# EAGLE board OPENBOOK v141 (EAGLE 9.7.0)
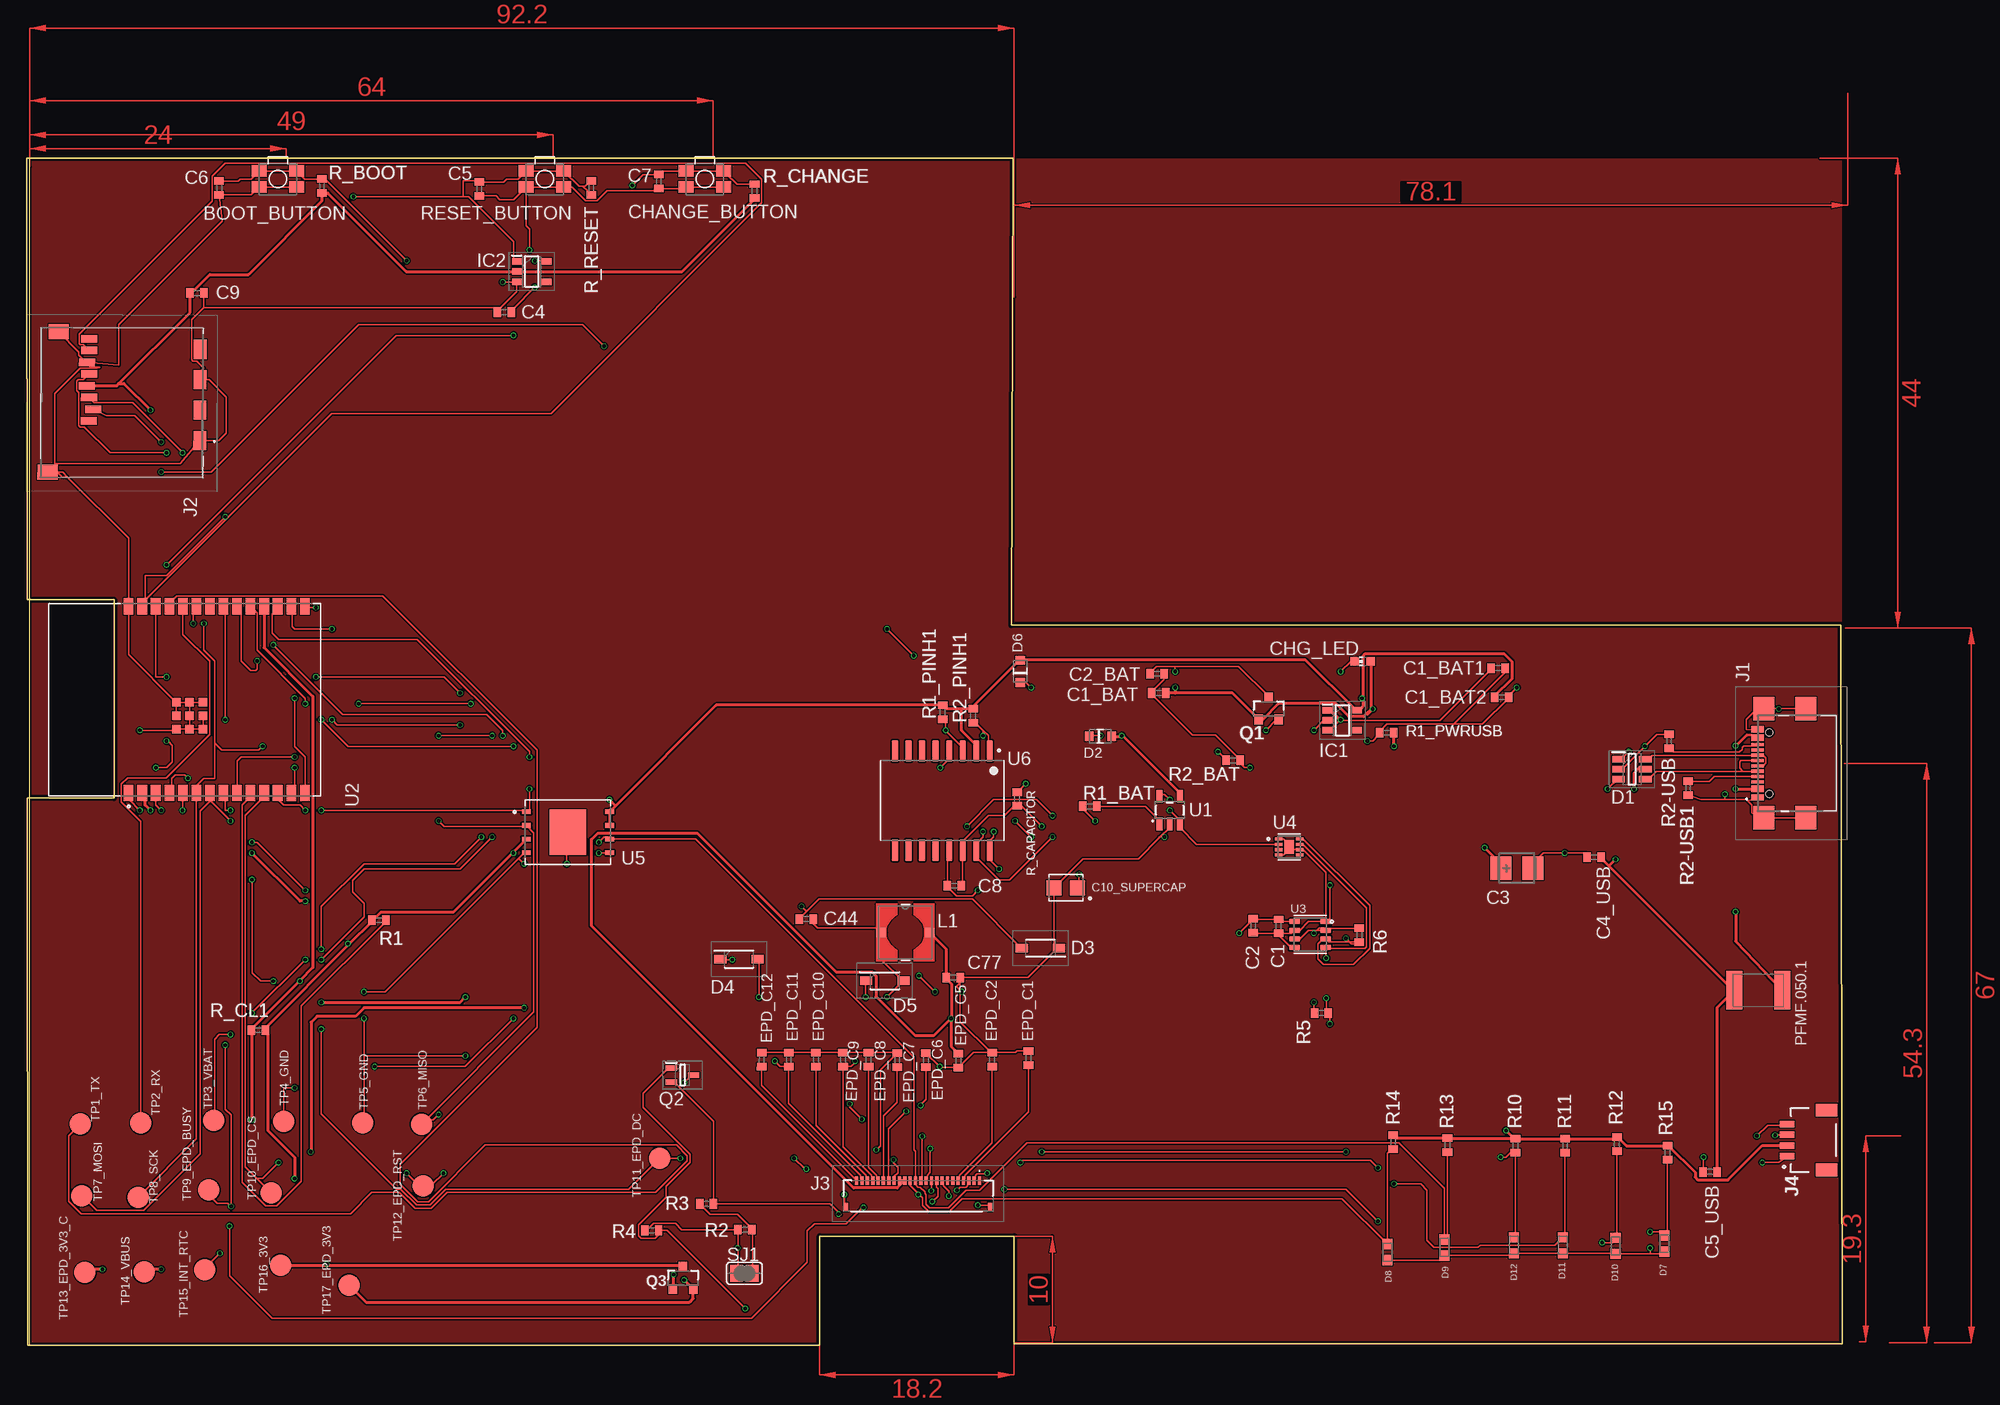
[diagram p0: board, top side]
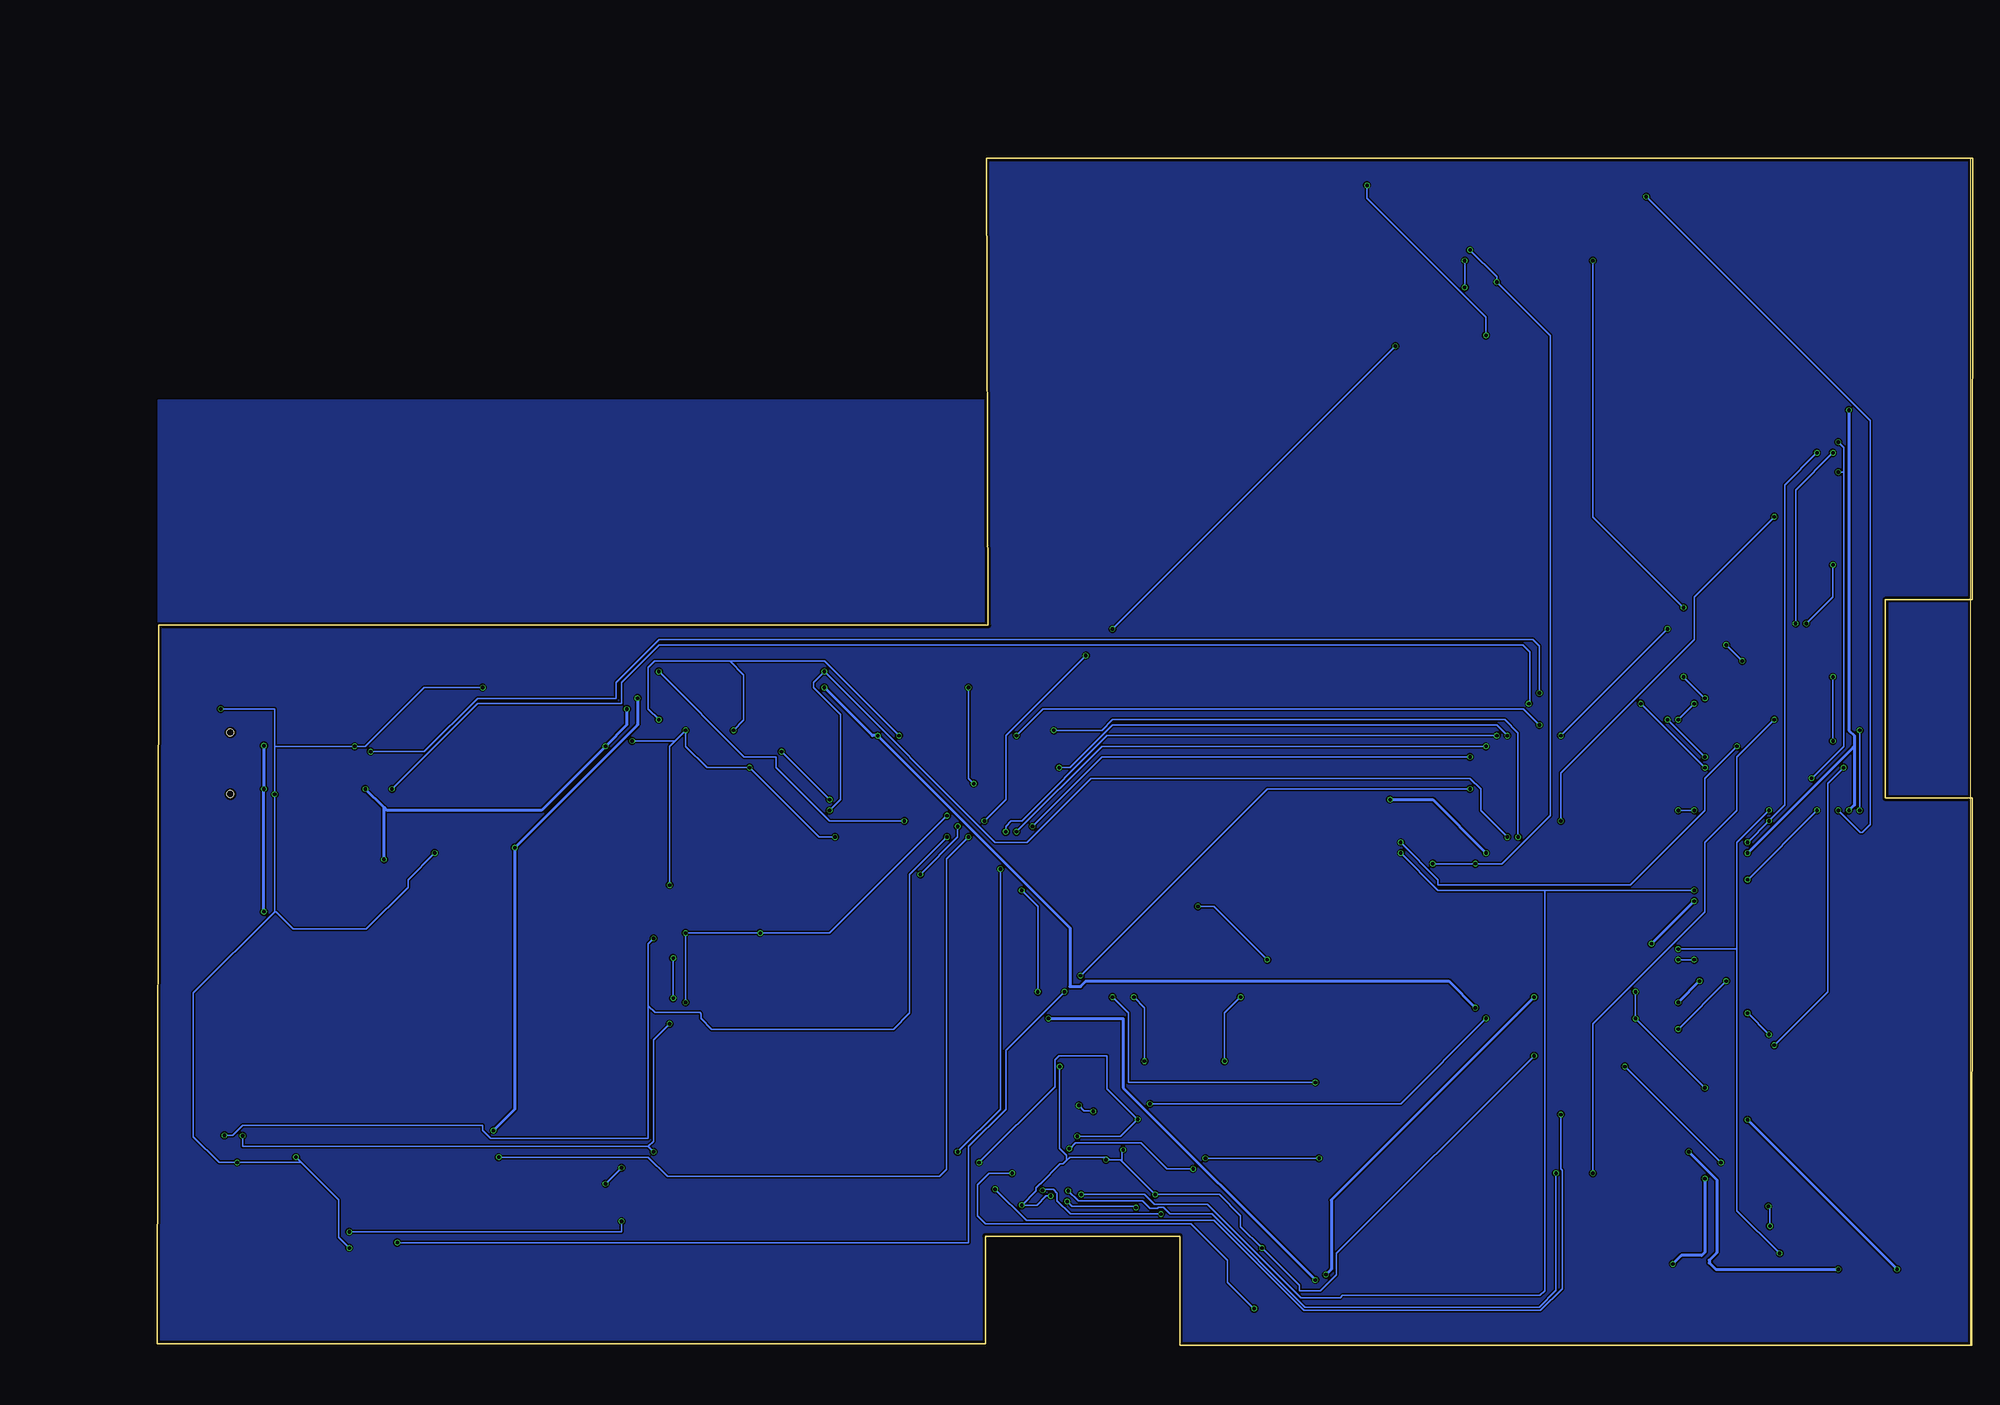
[diagram p1: board, bottom side, seen from below]

Size 170.1 x 111.2 mm. Coordinates in mm from the lower left corner, seen from the top.
Outline: 92.4,111.2 0.22,111.2 0.22,0
Outline: 92.4,111.2 92.25,67.45 169.95,67.45 170.1,0.1 92.5,0.1 92.5,10.2 74.3,10.2 74.3,0 0.1,0 0.05,51.25 8.2,51.25 8.2,69.84 0.04,69.84 0,111.2 92.4,111.2
Copper layers (1*16): Top 0.035mm / dielectric 1.6mm / Bottom 0.035mm
Design rules "jlcpcb-2layers.dru *": minimum track width 5mil, minimum drill 0.3mm, track to track 5mil, track to pad 5mil, pad to pad 5mil, via to via 5mil, smd to smd 5mil, copper to edge 0.2mm, drill to drill 6mil, minimum pad ring 10mil, minimum via ring 3mil, stop-mask expansion 4mil, vias tented up to drill 0mil, thermal gap 10mil

## Footprints (pad centres in the part's own frame; a part is rotated, then mirrored left to right if it is on the bottom)
MYBUTTON = smd 1.4 x 1.05: 1 1.75,0.75; 2 -1.75,0.75; 3 -1.75,-0.75; 4 1.75,-0.75
EAGLE-LTSPICE_C0402 = smd 0.7 x 0.9: 1 -0.65,0; 2 0.65,0
RCL_CT3528 = smd 2 x 2.2: + -1.5,0; - 1.5,0
CAPCP3225X100N = smd 1.4 x 1.4: 1 -1.1,0; 2 1.1,0
ADAFRUIT_CHIP-LED0603 = smd 0.8 x 0.8: A 0,-0.75; C 0,0.75
SOT95P280X145-6N = smd 1.2 x 0.6: 1 -1.25,0.95; 2 -1.25,0; 3 -1.25,-0.95; 4 1.25,-0.95; 5 1.25,0; 6 1.25,0.95
ESP32_WROVER_AVX---SD0805S020S1R0_AVX_SD0805S020S1R0_0 = smd 0.8 x 0.9: 1 -1.05,0; 2 1.05,0
SOD3716X135N = smd 1.15 x 0.8: 1 -1.75,0; 2 1.75,0
DIOC1608X36N = smd 0.97 x 0.94: 1 -0.75,0; 2 0.75,0
SOT95P280X120-5N = smd 0.9 x 0.6: 1 -1.4,0.95; 2 -1.4,0; 3 -1.4,-0.95; 4 1.4,-0.95; 5 1.4,0.95
SOT95P280X125-5N = smd 0.9 x 0.6: 1 -1.4,0.95; 2 -1.4,0; 3 -1.4,-0.95; 4 1.4,-0.95; 5 1.4,0.95
SAMACSYS_PARTS_USB4110GFA = smd 0.3 x 1.15: A1 -3.35,3.678; A4 -2.55,3.678; A5 -1.25,3.678; A6 -0.25,3.678; A7 0.25,3.678; A8 1.25,3.678; A9 2.55,3.678; A12 3.35,3.678; B1 3.05,3.678; B4 2.25,3.678; B5 1.75,3.678; B6 0.75,3.678; B7 -0.75,3.678; B8 -1.75,3.678; B9 -2.25,3.678; B12 -3.05,3.678 | smd 2.18 x 2: MP1 -5.11,-0.827; MP2 5.11,-0.827; MP3 -5.11,3.103; MP4 5.11,3.103 | hole 0.65: -2.89,2.603; 2.89,2.603
112ATAARR03ATTEND = smd 1.8 x 1.2: G1 10.6,10.4; G2 4.9,10.4; S1 7.75,10.4; S2 2.05,10.4 | smd 1.4 x 1.9: G3 13.6,-3.85; G4 0.45,-2.85 | smd 0.7 x 1.5: P1 8.8,0; P2 7.7,0.4; P3 6.6,0; P4 5.5,-0.2; P5 4.4,0; P6 3.3,-0.2; P7 2.2,0; P8 1.1,0
FH34SRJ24S05SH99 = smd 0.3 x 0.8: 1 5.75,1.45; 2 5.25,1.45; 3 4.75,1.45; 4 4.25,1.45; 5 3.75,1.45; 6 3.25,1.45; 7 2.75,1.45; 8 2.25,1.45; 9 1.75,1.45; 10 1.25,1.45; 11 0.75,1.45; 12 0.25,1.45; 13 -0.25,1.45; 14 -0.75,1.45; 15 -1.25,1.45; 16 -1.75,1.45; 17 -2.25,1.45; 18 -2.75,1.45; 19 -3.25,1.45; 20 -3.75,1.45; 21 -4.25,1.45; 22 -4.75,1.45; 23 -5.25,1.45; 24 -5.75,1.45 | smd 0.4 x 0.8: MP1 6.75,-1.05; MP2 -6.75,-1.05
JST04_1MM_RA = smd 0.6 x 1.35: 1 -1.5,0; 2 -0.5,0; 3 0.5,0; 4 1.5,0 | smd 1.2 x 2: NC1 2.8,-3.675; NC2 -2.8,-3.675
IND_4828-WE-TPC_WRE = smd 0.889 x 0.889: 1 -2.286,0; 2 2.286,0
ESP32C6_VARISTOR_CT/CN1812 = smd 1.5 x 3.6: 1 -2.25,0; 2 2.25,0
ESP32_WROVER_SPARKFUN-DISCRETESEMI_SOT23-3 = smd 0.8 x 0.9: 1 -0.95,-1; 2 0.95,-1; 3 0,1.1
SOT65P210X110-3N = smd 1.05 x 0.5: 1 -1.05,0.65; 2 -1.05,-0.65; 3 1.05,0
ESP32_WROVER_EAGLE-LTSPICE_R0402 = smd 0.7 x 0.9: 1 -0.65,0; 2 0.65,0
SJ = smd 1.168 x 1.6: 1 -0.762,0; 2 0.762,0
TP20R = smd 2 x 2: TP 0,0
ESP32_WROVER_SPARKFUN-IC-POWER_SOT23-5 = smd 0.55 x 1.2: 1 -0.95,-1.3; 2 0,-1.3; 3 0.95,-1.3; 4 0.95,1.3; 5 -0.95,1.3
XCVR_ESP32-C6-WROOM-1-N8 = smd 1.5 x 0.9: 1 -8.75,5.26; 2 -8.75,3.99; 3 -8.75,2.72; 4 -8.75,1.45; 5 -8.75,0.18; 6 -8.75,-1.09; 7 -8.75,-2.36; 8 -8.75,-3.63; 9 -8.75,-4.9; 10 -8.75,-6.17; 11 -8.75,-7.44; 12 -8.75,-8.71; 13 -8.75,-9.98; 14 -8.75,-11.25; 15 8.75,-11.25; 16 8.75,-9.98; 17 8.75,-8.71; 18 8.75,-7.44; 19 8.75,-6.17; 20 8.75,-4.9; 21 8.75,-3.63; 22 8.75,-2.36; 23 8.75,-1.09; 24 8.75,0.18; 25 8.75,1.45; 26 8.75,2.72; 27 8.75,3.99; 28 8.75,5.26 | smd 0.8 x 0.8: 29_1 -2.755,0.79; 29_2 -1.505,0.79; 29_3 -0.255,0.79; 29_4 -2.755,-0.46; 29_5 -1.505,-0.46; 29_6 -0.255,-0.46; 29_7 -2.755,-1.71; 29_8 -1.505,-1.71; 29_9 -0.255,-1.71
ESP32_WROVER_BME680_PSON80P300X300X100-8N = smd 1.016 x 0.5: 1 1.458,1.2; 2 1.458,0.4; 3 1.458,-0.4; 4 1.458,-1.2; 5 -1.458,-1.22; 6 -1.458,-0.4; 7 -1.458,0.4; 8 -1.458,1.2
SON50P200X200X80-9N = smd 0.76 x 0.27: 1 -0.985,0.75; 2 -0.985,0.25; 3 -0.985,-0.25; 4 -0.985,-0.75; 5 0.985,-0.75; 6 0.985,-0.25; 7 0.985,0.25; 8 0.985,0.75 | smd 0.9 x 1.3: 9 0,0
SON127P600X800X80-9N = smd 0.94 x 0.44: 1 -3.895,1.905; 2 -3.895,0.635; 3 -3.895,-0.635; 4 -3.895,-1.905; 5 3.895,-1.905; 6 3.895,-0.635; 7 3.895,0.635; 8 3.895,1.905 | smd 3.4 x 4.3: 9 0,0
SOIC127P1032X265-16N = smd 2.05 x 0.59: 1 -4.655,4.445; 2 -4.655,3.175; 3 -4.655,1.905; 4 -4.655,0.635; 5 -4.655,-0.635; 6 -4.655,-1.905; 7 -4.655,-3.175; 8 -4.655,-4.445; 9 4.655,-4.445; 10 4.655,-3.175; 11 4.655,-1.905; 12 4.655,-0.635; 13 4.655,0.635; 14 4.655,1.905; 15 4.655,3.175; 16 4.655,4.445

## Placement (x,y rotation side)
BOOT_BUTTON  BUTTON_CUSYOMV1  [MYBUTTON]  23.54,109.26 180 top
C1  100nF  [EAGLE-LTSPICE_C0402]  117.28,39.23 270 top
C1_BAT  4.7uF  [EAGLE-LTSPICE_C0402]  106.04,61.09 180 top
C1_BAT1  4.7uF  [EAGLE-LTSPICE_C0402]  137.87,63.43 0 top
C1_BAT2  4.7uF  [EAGLE-LTSPICE_C0402]  138.17,60.7 0 top
C2  100nF  [EAGLE-LTSPICE_C0402]  114.91,39.28 270 top
C2_BAT  4.7uF  [EAGLE-LTSPICE_C0402]  105.92,62.89 0 top
C3  100uF  [RCL_CT3528]  139.61,44.66 0 top
C4  100nF  [EAGLE-LTSPICE_C0402]  44.74,96.78 180 top
C4_USB  100nF  [EAGLE-LTSPICE_C0402]  146.84,45.72 180 top
C5  1uF  [EAGLE-LTSPICE_C0402]  42.42,108.32 270 top
C5_USB  4.7uF  [EAGLE-LTSPICE_C0402]  157.71,16.22 180 top
C6  100nF  [EAGLE-LTSPICE_C0402]  18.03,108.42 270 top
C7  100nF  [EAGLE-LTSPICE_C0402]  59.22,109.02 270 top
C8  100nF  [EAGLE-LTSPICE_C0402]  86.91,43.04 180 top
C9  100nF  [EAGLE-LTSPICE_C0402]  15.95,98.57 0 top
C10_SUPERCAP  CPH3225A  [CAPCP3225X100N]  97.36,42.85 180 top
C44  4.7uF/25V  [EAGLE-LTSPICE_C0402]  73.03,39.92 0 top
C77  10uF  [EAGLE-LTSPICE_C0402]  86.8,34.44 0 top
CHANGE_BUTTON  BUTTON_CUSYOMV1  [MYBUTTON]  63.53,109.26 180 top
CHG_LED  [ADAFRUIT_CHIP-LED0603]  125.17,64.06 90 top
D1  USBLC6-2SC6Y  [SOT95P280X145-6N]  150.39,53.95 0 top
D2  ESP32_WROVER_AVX---SD0805S020S1R0_AVX_SD0805S020S1R0_0_0AVX_SD0805S020S1R0_0_0  [ESP32_WROVER_AVX---SD0805S020S1R0_AVX_SD0805S020S1R0_0]  100.59,57.04 0 top
D3  MBR0530  [SOD3716X135N]  94.97,37.18 180 top
D4  MBR0530  [SOD3716X135N]  66.73,36.16 0 top
D5  MBR0530  [SOD3716X135N]  80.39,34.13 0 top
D6  ESP32_WROVER_AVX---SD0805S020S1R0_AVX_SD0805S020S1R0_0_0AVX_SD0805S020S1R0_0_0  [ESP32_WROVER_AVX---SD0805S020S1R0_AVX_SD0805S020S1R0_0]  93.08,63.13 90 top
D7  PGB1010603MR  [DIOC1608X36N]  153.44,9.5 90 top
D8  PGB1010603MR  [DIOC1608X36N]  127.48,8.7 90 top
D9  PGB1010603MR  [DIOC1608X36N]  132.82,9.15 90 top
D10  PGB1010603MR  [DIOC1608X36N]  148.86,9.3 90 top
D11  PGB1010603MR  [DIOC1608X36N]  143.9,9.35 90 top
D12  PGB1010603MR  [DIOC1608X36N]  139.34,9.35 90 top
EPD_C1  1uF/50V  [EAGLE-LTSPICE_C0402]  93.86,26.9 90 top
EPD_C2  1uF/50V  [EAGLE-LTSPICE_C0402]  90.45,26.75 90 top
EPD_C5  0.1uF/50V  [EAGLE-LTSPICE_C0402]  87.29,26.65 270 top
EPD_C6  1uF/50V  [EAGLE-LTSPICE_C0402]  84.25,26.7 90 top
EPD_C7  1uF/50V  [EAGLE-LTSPICE_C0402]  81.56,26.7 90 top
EPD_C8  1uF/50V  [EAGLE-LTSPICE_C0402]  78.87,26.75 89.8 top
EPD_C9  1uF/50V  [EAGLE-LTSPICE_C0402]  76.48,26.75 90.3 top
EPD_C10  1uF/50V  [EAGLE-LTSPICE_C0402]  73.94,26.75 90 top
EPD_C11  1uF/50V  [EAGLE-LTSPICE_C0402]  71.4,26.75 90 top
EPD_C12  1uF/50V  [EAGLE-LTSPICE_C0402]  68.86,26.75 89.5 top
IC1  XC6220A331MR-G  [SOT95P280X120-5N]  123.26,58.54 0 top
IC2  BD5229G-TR  [SOT95P280X125-5N]  47.31,100.58 0 top
J1  SAMACSYS_PARTS_USB4110-GF-A  [SAMACSYS_PARTS_USB4110GFA]  165.85,54.51 90 top
J2  112A-TAAR-R03_ATTEND  [112ATAARR03ATTEND]  5.86,95.38 269.8 top
J3  FH34SRJ-24S-0.5SH_99_  [FH34SRJ24S05SH99]  83.51,13.98 0 top
J4  QWIIC_RIGHT_ANGLE  [JST04_1MM_RA]  164.93,19.2 90 top
L1  68uH  [IND_4828-WE-TPC_WRE]  82.32,38.66 0 top
PFMF.050.1  ESP32C6_VARISTORCN1812  [ESP32C6_VARISTOR_CT/CN1812]  162.24,33.24 180 top
Q1  20V/4.2A/52mΩ/1.4W  [ESP32_WROVER_SPARKFUN-DISCRETESEMI_SOT23-3]  116.36,59.61 0 top
Q2  SI1308EDL-T1-GE3  [SOT65P210X110-3N]  61.44,25.3 0 top
Q3  20V/4.2A/52mΩ/1.4W  [ESP32_WROVER_SPARKFUN-DISCRETESEMI_SOT23-3]  61.49,6.26 0 top
R1  10K  [ESP32_WROVER_EAGLE-LTSPICE_R0402]  33.01,39.8 180 top
R1_BAT  200  [ESP32_WROVER_EAGLE-LTSPICE_R0402]  99.6,50.47 0 top
R1_PINH1  10K  [ESP32_WROVER_EAGLE-LTSPICE_R0402]  85.81,59.3 90 top
R1_PWRUSB  100K  [ESP32_WROVER_EAGLE-LTSPICE_R0402]  127.41,57.38 0 top
R2  2.2  [ESP32_WROVER_EAGLE-LTSPICE_R0402]  67.29,10.81 0 top
R2-USB  5k1  [ESP32_WROVER_EAGLE-LTSPICE_R0402]  153.87,56.58 90 top
R2-USB1  5k1  [ESP32_WROVER_EAGLE-LTSPICE_R0402]  155.66,52.17 90 top
R2_BAT  2K  [ESP32_WROVER_EAGLE-LTSPICE_R0402]  113.02,54.78 180 top
R2_PINH1  10K  [ESP32_WROVER_EAGLE-LTSPICE_R0402]  88.67,58.95 90 top
R3  0.47  [ESP32_WROVER_EAGLE-LTSPICE_R0402]  63.7,13.23 0 top
R4  10K  [ESP32_WROVER_EAGLE-LTSPICE_R0402]  58.55,10.75 0 top
R5  10K  [ESP32_WROVER_EAGLE-LTSPICE_R0402]  121.3,31.11 180 top
R6  10K  [ESP32_WROVER_EAGLE-LTSPICE_R0402]  124.85,38.4 90 top
R10  10K  [ESP32_WROVER_EAGLE-LTSPICE_R0402]  139.47,18.68 90 top
R11  10K  [ESP32_WROVER_EAGLE-LTSPICE_R0402]  144.13,18.68 90 top
R12  10K  [ESP32_WROVER_EAGLE-LTSPICE_R0402]  148.99,18.83 90 top
R13  10K  [ESP32_WROVER_EAGLE-LTSPICE_R0402]  133.1,18.73 90 top
R14  10K  [ESP32_WROVER_EAGLE-LTSPICE_R0402]  128.01,19.03 90 top
R15  10K  [ESP32_WROVER_EAGLE-LTSPICE_R0402]  153.72,18.03 90 top
R_BOOT  10K  [ESP32_WROVER_EAGLE-LTSPICE_R0402]  27.65,108.59 270 top
R_CAPACITOR  [ESP32_WROVER_EAGLE-LTSPICE_R0402]  92.79,51.17 270 top
R_CHANGE  10K  [ESP32_WROVER_EAGLE-LTSPICE_R0402]  68.19,108.12 270 top
R_CL1  10K  [ESP32_WROVER_EAGLE-LTSPICE_R0402]  21.7,29.5 0 top
R_RESET  10K  [ESP32_WROVER_EAGLE-LTSPICE_R0402]  52.91,108.42 90 top
RESET_BUTTON  BUTTON_CUSYOMV1  [MYBUTTON]  48.55,109.26 180 top
SJ1  [SJ]  67.24,6.72 0 top
TP1_TX  TPTP20R  [TP20R]  5.04,20.71 0 top
TP2_RX  TPTP20R  [TP20R]  10.69,20.81 0 top
TP3_VBAT  TPTP20R  [TP20R]  17.54,21.04 0 top
TP4_GND  TPTP20R  [TP20R]  24.08,20.94 0 top
TP5_GND  TPTP20R  [TP20R]  31.48,20.84 0 top
TP6_MISO  TPTP20R  [TP20R]  36.99,20.69 0 top
TP7_MOSI  TPTP20R  [TP20R]  5.17,13.99 0 top
TP8_SCK  TPTP20R  [TP20R]  10.44,13.84 0 top
TP9_EPD_BUSY  TPTP20R  [TP20R]  17.06,14.54 0 top
TP10_EPD_CS  TPTP20R  [TP20R]  22.9,14.26 0 top
TP11_EPD_DC  TPTP20R  [TP20R]  59.3,17.51 0 top
TP12_EPD_RST  TPTP20R  [TP20R]  37.15,14.91 0 top
TP13_EPD_3V3_C  TPTP20R  [TP20R]  5.45,6.81 0 top
TP14_VBUS  TPTP20R  [TP20R]  11,6.86 0 top
TP15_INT_RTC  TPTP20R  [TP20R]  16.7,7.06 0 top
TP16_3V3  TPTP20R  [TP20R]  23.78,7.48 0 top
TP17_EPD_3V3  TPTP20R  [TP20R]  30.2,5.61 0 top
U1  ESP32_WROVER_SPARKFUN-IC-POWER_MCP73831  [ESP32_WROVER_SPARKFUN-IC-POWER_SOT23-5]  107.09,50.12 0 top
U2  ESP32-C6-WROOM-1-N8  [XCVR_ESP32-C6-WROOM-1-N8]  14.81,60.47 90 top
U3  ESP32_WROVER_BME680_BME680  [ESP32_WROVER_BME680_PSON80P300X300X100-8N]  120.24,38.47 0 top
U4  MAX17048G+T10  [SON50P200X200X80-9N]  118.28,46.67 0 top
U5  W25Q512JVEIQ  [SON127P600X800X80-9N]  50.71,48.05 0 top
U6  DS3231SN#  [SOIC127P1032X265-16N]  85.79,51.01 270 top

## Library data of the parts
BOOT_BUTTON CHANGE_BUTTON CHG_LED PFMF.050.1 RESET_BUTTON SJ1 TP1_TX TP2_RX TP3_VBAT TP4_GND TP5_GND TP6_MISO TP7_MOSI TP8_SCK TP9_EPD_BUSY TP10_EPD_CS TP11_EPD_DC TP12_EPD_RST TP13_EPD_3V3_C TP14_VBUS TP15_INT_RTC TP16_3V3 TP17_EPD_3V3 = DeskAssistant_v19_v1
C1 C1_BAT C1_BAT1 C1_BAT2 C2 C2_BAT C4 C4_USB C5 C5_USB C6-C9 C44 C77 EPD_C1 EPD_C2 EPD_C5-EPD_C12 = DeskAssistant_v19_v1; SPICEMODEL: NONE; SPICEPREFIX: C
C3 = DeskAssistant_v19_v1; SPICEPREFIX: C
C10_SUPERCAP = DeskAssistant_v19_v1; AVAILABILITY: Not in stock; CHECK_PRICES: https://www.snapeda.com/parts/CPH3225A/Seiko+Instruments/view-part/?ref=eda; DESCRIPTION: 11 mF (EDLC) Supercapacitor 3.3 V 1210 (3225 Metric) - -; MF: Seiko Instruments; MP: CPH3225A; PACKAGE: 1210 Seiko; PRICE: None; PURCHASE-URL: https://www.snapeda.com/api/url_track_click_mouser/?unipart_id=562593&manufacturer=Seiko Instruments&part_name=CPH3225A&search_term=None; SNAPEDA_LINK: https://www.snapeda.com/parts/CPH3225A/Seiko+Instruments/view-part/?ref=snap
D1 = DeskAssistant_v19_v1; AVAILABILITY: In Stock; CHECK_PRICES: https://www.snapeda.com/parts/USBLC6-2SC6Y/STMicroelectronics/view-part/?ref=eda; DESCRIPTION: 17V Clamp 5A (8/20µs) Ipp Tvs Diode Surface Mount SOT-23-6; MF: STMicroelectronics; MP: USBLC6-2SC6Y; PACKAGE: SOT-23-6 STMicroelectronics; PRICE: None; SNAPEDA_LINK: https://www.snapeda.com/parts/USBLC6-2SC6Y/STMicroelectronics/view-part/?ref=snap
D2 D6 = DeskAssistant_v19_v1; CENTROID_NOT_SPECIFIED: No; DATASHEET: http://datasheets.avx.com/schottky.pdf; DIGIKEY_DESCRIPTION: DIODE SCHOTTKY 20V 1A 0805; DIGIKEY_PART_NUMBER: 478-7800-1-ND; LEAD_FREE: yes; MF: AVX; MOUSER_PART_NUMBER: 581-SD0805S020S1R0; PACKAGE: 0805 (2012 metric); PREFIX: D; ROHS: yes; TEMPERATURE_RANGE_HIGH: +125°C; TEMPERATURE_RANGE_LOW: -55°C
D3-D5 = DeskAssistant_v19_v1; AVAILABILITY: In Stock; CHECK_PRICES: https://www.snapeda.com/parts/MBR0530/Onsemi/view-part/?ref=eda; DESCRIPTION: Diode Schottky 30 V 500mA Surface Mount SOD-123; MF: ON Semiconductor; MP: MBR0530; PACKAGE: SOD-123-2 ON Semiconductor; PRICE: None; PURCHASE-URL: https://www.snapeda.com/api/url_track_click_mouser/?unipart_id=179458&manufacturer=ON Semiconductor&part_name=MBR0530&search_term=None; SNAPEDA_LINK: https://www.snapeda.com/parts/MBR0530/Onsemi/view-part/?ref=snap
D7-D12 = DeskAssistant_v19_v1; AVAILABILITY: In Stock; CHECK_PRICES: https://www.snapeda.com/parts/PGB1010603MR/Littelfuse/view-part/?ref=eda; DESCRIPTION: 150V (Typ) Clamp - Ipp Tvs Diode Surface Mount 0603 (1608 Metric); MF: Littelfuse Inc.; MP: PGB1010603MR; PACKAGE: 0603 Littelfuse Inc.; PRICE: None; PURCHASE-URL: https://www.snapeda.com/api/url_track_click_mouser/?unipart_id=5659453&manufacturer=Littelfuse Inc.&part_name=PGB1010603MR&search_term=None; SNAPEDA_LINK: https://www.snapeda.com/parts/PGB1010603MR/Littelfuse/view-part/?ref=snap
IC1 = DeskAssistant_v19_v1; DESCRIPTION: LDO Voltage Regulators; HEIGHT: 1.2mm; MANUFACTURER_NAME: Torex; MANUFACTURER_PART_NUMBER: XC6220A331MR-G; MOUSER_PART_NUMBER: 865-XC6220A331MR-G; MOUSER_PRICE-STOCK: https://www.mouser.co.uk/ProductDetail/Torex-Semiconductor/XC6220A331MR-G?qs=AsjdqWjXhJ8ZSWznL1J0gg%3D%3D
IC2 = DeskAssistant_v19_v1; DESCRIPTION: Voltage Detector with Adjustable Delay Time: CMOS processes are utilized to develop high precision, low current consumption CMOS reset ICs that allow arbitrary setting of the delay time. The extensive lineup includes both Nch Open Drain and CMOS output types in a wide range of detection voltages (from 2.3V to 6.0V, in 0.1V steps), enabling selection of the ideal solution based on customer requirements. In addition, the entire series is of course both lead-free and RoHS-compliant.; HEIGHT: 1.25mm; MANUFACTURER_NAME: ROHM Semiconductor; MANUFACTURER_PART_NUMBER: BD5229G-TR; MOUSER_PART_NUMBER: 755-BD5229G-TR; MOUSER_PRICE-STOCK: https://www.mouser.co.uk/ProductDetail/ROHM-Semiconductor/BD5229G-TR?qs=4kLU8WoGk0vvnhrrYwdszw%3D%3D
J1 = DeskAssistant_v19_v1; DESCRIPTION: CONN USB 2.0 TYPE-C R/A SMT; HEIGHT: 3.26mm; MANUFACTURER_NAME: GCT (GLOBAL CONNECTOR TECHNOLOGY); MANUFACTURER_PART_NUMBER: USB4110-GF-A; MOUSER_PART_NUMBER: 640-USB4110-GF-A; MOUSER_PRICE-STOCK: https://www.mouser.co.uk/ProductDetail/GCT/USB4110-GF-A?qs=KUoIvG%2F9IlYiZvIXQjyJeA%3D%3D
J2 = DeskAssistant_v19_v1; DESCRIPTION: Micro SD Card Socket, Push-Push Type, Top Mount, SMT, H=1.83mm, 10u; HEIGHT: 1.9mm; MANUFACTURER_NAME: ATTEND; MANUFACTURER_PART_NUMBER: 112A-TAAR-R03 ATTEND
J3 = DeskAssistant_v19_v1; DESCRIPTION: 24 Position FFC, FPC Connector Contacts, Top and Bottom 0.020" (0.50mm) Surface Mount, Right Angle; HEIGHT: 1.1mm; MANUFACTURER_NAME: Hirose; MANUFACTURER_PART_NUMBER: FH34SRJ-24S-0.5SH(99); MOUSER_PART_NUMBER: 798-FH34SRJ24S05SH99; MOUSER_PRICE-STOCK: https://www.mouser.co.uk/ProductDetail/Hirose-Connector/FH34SRJ-24S-0.5SH99?qs=vcbW%252B4%252BSTIpKBl5ap9J8Fw%3D%3D
J4 = DeskAssistant_v19_v1; PROD_ID: CONN-13694
L1 = DeskAssistant v19 v1; COPYRIGHT: Copyright (C) 2024 Ultra Librarian. All rights reserved.; MANUFACTURER_PART_NUMBER: 744043680; MFR_NAME: Wurth Electronics
Q1 Q3 = DeskAssistant_v19_v1; PROD_ID: TRAN-14388
Q2 = DeskAssistant_v19_v1; AVAILABILITY: In Stock; CHECK_PRICES: https://www.snapeda.com/parts/SI1308EDL-T1-GE3/Vishay+Siliconix/view-part/?ref=eda; DESCRIPTION: Si1308EDL-T1-GE3 N-channel MOSFET Transistor, 1.5 A, 30 V, 3-Pin SC-70 | Siliconix / Vishay SI1308EDL-T1-GE3; MF: Vishay Siliconix; MP: SI1308EDL-T1-GE3; PACKAGE: SOT-323 Vishay Semiconductor; PRICE: None; PURCHASE-URL: https://www.snapeda.com/api/url_track_click_mouser/?unipart_id=274603&manufacturer=Vishay Siliconix&part_name=SI1308EDL-T1-GE3&search_term=None; SNAPEDA_LINK: https://www.snapeda.com/parts/SI1308EDL-T1-GE3/Vishay+Siliconix/view-part/?ref=snap
R1 R1_BAT R1_PINH1 R1_PWRUSB R2 R2-USB R2-USB1 R2_BAT R2_PINH1 R3-R6 R10-R15 R_BOOT R_CAPACITOR R_CHANGE R_CL1 R_RESET = DeskAssistant_v19_v1; SPICEMODEL: NONE; SPICEPREFIX: R
U1 = DeskAssistant_v19_v1; PROD_ID: IC-09995
U2 = DeskAssistant_v19_v1; AVAILABILITY: In Stock; CHECK_PRICES: https://www.snapeda.com/parts/ESP32-C6-WROOM-1-N8/Espressif+Systems/view-part/?ref=eda; DESCRIPTION: Multiprotocol Modules ESP32-C6 module, Wi-Fi 6 in 2.4 GHz band, Bluetooth 5, Zigbee 3.0 and Thread. ESP34-WROOM Compatible - ENGINEERING SAMPLE; MF: Espressif Systems; MP: ESP32-C6-WROOM-1-N8; PACKAGE: None; PRICE: None; SNAPEDA_LINK: https://www.snapeda.com/parts/ESP32-C6-WROOM-1-N8/Espressif+Systems/view-part/?ref=snap
U3 = DeskAssistant_v19_v1; AVAILABILITY: Unavailable; DESCRIPTION: Integrated Environmental Unit; MF: Bosch Sensortec; MP: BME680; PACKAGE: LGA-8 Bosch Tools; PRICE: None
U4 = DeskAssistant_v19_v1; AVAILABILITY: In Stock; CHECK_PRICES: https://www.snapeda.com/parts/MAX17048G+T10/Analog+Devices/view-part/?ref=eda; DESCRIPTION: 3µA 1-Cell/2-Cell Fuel Gauge with ModelGauge; MF: Analog Devices; MP: MAX17048G+T10; PACKAGE: TDFN-8 Maxim; PRICE: None; PURCHASE-URL: https://www.snapeda.com/api/url_track_click_mouser/?unipart_id=329239&manufacturer=Analog Devices&part_name=MAX17048G+T10&search_term=None; SNAPEDA_LINK: https://www.snapeda.com/parts/MAX17048G+T10/Analog+Devices/view-part/?ref=snap
U5 = DeskAssistant_v19_v1; AVAILABILITY: In Stock; CHECK_PRICES: https://www.snapeda.com/parts/W25Q512JVEIQ/Winbond+Electronics/view-part/?ref=eda; DESCRIPTION: FLASH - NOR Memory IC 512Mb (64M x 8) SPI - Quad I/O 133 MHz 8-WSON (8x6); MF: Winbond Electronics; MP: W25Q512JVEIQ; PACKAGE: Package; PRICE: None; SNAPEDA_LINK: https://www.snapeda.com/parts/W25Q512JVEIQ/Winbond+Electronics/view-part/?ref=snap
U6 = DeskAssistant_v19_v1; AVAILABILITY: In Stock; CHECK_PRICES: https://www.snapeda.com/parts/DS3231SN%23/Analog+Devices/view-part/?ref=eda; DESCRIPTION: Extremely Accurate I²C-Integrated RTC/TCXO/Crystal; MF: Analog Devices; MP: DS3231SN#; PACKAGE: SOIC-16 Maxim; PRICE: None; PURCHASE-URL: https://www.snapeda.com/api/url_track_click_mouser/?unipart_id=99048&manufacturer=Analog Devices&part_name=DS3231SN#&search_term=None; SNAPEDA_LINK: https://www.snapeda.com/parts/DS3231SN%23/Analog+Devices/view-part/?ref=snap

## Nets
3V3 [trasee putere]: C1_BAT2.1 C3.+ C9.1 D6.2 IC1.5 IC2.2 J2.P4 J4.2 Q3.3 R1.2 R1_PINH1.2 R2_PINH1.2 R10.2 R11.2 R12.2 R13.2 R14.2 R15.2 R_BOOT.2 R_CHANGE.2 R_CL1.2 TP16_3V3.TP U2.2 U5.3 U5.7 U5.8 U6.2
32KHZ: R2_PINH1.1 U2.9 U6.1
DN: D1.4 J1.A7 J1.B7
DP: D1.6 J1.A6 J1.B6
EPD_3V3 [trasee putere]: C77.1 EPD_C5.1 J3.15 J3.16 L1.2 Q3.2 TP17_EPD_3V3.TP
EPD_3V3_C [trasee putere]: Q3.1 R_CL1.1 TP13_EPD_3V3_C.TP U2.18
EPD_BUSY: J3.9 TP9_EPD_BUSY.TP U2.26
EPD_CS: D11.2 J3.12 R11.1 TP10_EPD_CS.TP U2.11
EPD_DC: J3.11 TP11_EPD_DC.TP U2.5
EPD_RST: J3.10 TP12_EPD_RST.TP U2.21
FLASH_CS: D10.2 R12.1 U2.12 U5.1
GDR: J3.2 Q2.1 R4.2
GND: BOOT_BUTTON.1 BOOT_BUTTON.2 C1.2 C1_BAT1.2 C1_BAT2.2 C1_BAT.2 C2.2 C2_BAT.2 C3.- C4.2 C4_USB.2 C5.2 C5_USB.2 C6.2 C7.2 C8.2 C9.2 C10_SUPERCAP.2 C77.2 CHANGE_BUTTON.1 CHANGE_BUTTON.2 D1.2 D3.1 D7.1 D8.1 D9.1 D10.1 D11.1 D12.1 EPD_C1.2 EPD_C2.2 EPD_C5.2 EPD_C6.2 EPD_C7.2 EPD_C8.2 EPD_C9.2 EPD_C10.2 EPD_C11.2 EPD_C12.2 IC1.2 IC2.3 J1.A1 J1.A12 J1.B1 J1.B12 J1.MP1 J1.MP2 J1.MP3 J1.MP4 J2.G1 J2.G2 J2.G3 J2.G4 J2.P6 J3.8 J3.17 J3.MP1 J3.MP2 J4.1 R1_PWRUSB.1 R2-USB1.1 R2-USB.2 R2.1 R2_BAT.1 R4.1 RESET_BUTTON.1 RESET_BUTTON.2 SJ1.1 TP4_GND.TP TP5_GND.TP U1.2 U2.1 U2.28 U2.29_1 U2.29_2 U2.29_3 U2.29_4 U2.29_5 U2.29_6 U2.29_7 U2.29_8 U2.29_9 U3.1 U3.5 U3.7 U4.1 U4.4 U4.6 U4.9 U5.4 U5.9 U6.13
GPIO8: R1.1 U2.10
I2C_PW: C1.1 C2.1 R5.2 R6.2 U2.17 U3.2 U3.6 U3.8
INT_RTC: R1_PINH1.1 TP15_INT_RTC.TP U2.8 U6.3
IO/BOOT: BOOT_BUTTON.3 BOOT_BUTTON.4 C6.1 R_BOOT.1 U2.15
IO/CHANGE: C7.1 CHANGE_BUTTON.3 CHANGE_BUTTON.4 R_CHANGE.1 U2.23
MISO: D7.2 J2.P7 R15.1 TP6_MISO.TP U2.27 U5.2
MOSI: D8.2 J2.P3 J3.14 R14.1 TP7_MOSI.TP U2.7 U5.5
N$1: J1.B5 R2-USB.1
N$2: C1_BAT1.1 D2.1 IC1.1 IC1.3 Q1.2
N$3: R1_BAT.2 U1.1
N$4: CHG_LED.C R1_BAT.1
N$5: EPD_C1.1 J3.4
N$6: R2_BAT.2 U1.5
N$7: EPD_C2.1 J3.5
N$8: C44.1 D3.2 D4.1
N$9: J1.A5 R2-USB1.2
N$10: C4.1 IC2.5
N$11: EPD_C6.1 J3.18
N$12: EPD_C7.1 J3.19
N$13: EPD_C8.1 J3.20
N$14: EPD_C10.1 J3.22
N$15: EPD_C12.1 J3.24
N$17: D6.1 R_CAPACITOR.1
PREVGH: D5.1 EPD_C9.1 J3.21
PREVGL: D4.2 EPD_C11.1 J3.23
RESE: J3.3 Q2.2 R3.2
RESE': R2.2 R3.1 SJ1.2
RESET: C5.1 IC2.1 R_RESET.1 R_RESET.2 RESET_BUTTON.3 RESET_BUTTON.4 U2.3
RTC_RST: U2.16 U6.4
RX: TP2_RX.TP U2.24
SCK: D9.2 J2.P5 J3.13 R13.1 TP8_SCK.TP U2.6 U5.6
SCL: J4.4 R5.1 U2.20 U3.4 U4.7 U6.16
SDA: J4.3 R6.1 U2.19 U3.3 U4.8 U6.15
SRC: C44.2 D5.2 L1.1 Q2.3
SS_SD: D12.2 J2.P2 R10.1 U2.4
TX: TP1_TX.TP U2.25
USB_D+: D1.1 U2.14
USB_D-: D1.3 U2.13
VBAT: C2_BAT.1 Q1.3 TP3_VBAT.TP U1.3 U4.2 U4.3
VBUS [trasee putere]: C1_BAT.1 C4_USB.1 C5_USB.1 CHG_LED.A D1.5 D2.2 PFMF.050.1.2 Q1.1 R1_PWRUSB.2 TP14_VBUS.TP U1.4
VRTC: C8.1 C10_SUPERCAP.1 R_CAPACITOR.2 U6.14
VUSB [trasee putere]: J1.A4 J1.A9 J1.B4 J1.B9 PFMF.050.1.1

## Tracks (layer width: path | path; a pad name or v marks a point on that pad's centre or on a via)
3V3  (via drill 0.35)
  Top 0.3: J2.P4 8.44,89.88 8.63,90.07 | 8.63,90.07 15.3,96.74 C9.1 15.41,98.57 17.15,100.31 20.79,100.31 27.65,107.18 R_BOOT.2 28.2,107.94 35.56,100.58 IC2.2 61.41,100.58 68.19,107.36 R_CHANGE.2 | 87.6,59.6 R2_PINH1.2 88.67,59.82 93.03,64.18 D6.2 119.82,64.18 124.51,59.49 IC1.5 124.81,59.49 125.17,59.85 125.17,60.6 | 87.6,59.6 86.16,59.6 R1_PINH1.2 64.6,59.95 55.18,50.52 | 55.18,50.52 U5.8 54.6,50.1 54.6,48.6 U5.7 | J4.2 162.62,18.7 159.39,15.47 156.59,15.47 156.31,15.74 156.31,16.19 153.82,18.68 R15.2 149.89,18.68 149.09,19.48 R12.2 148.84,19.33 R11.2 R10.2 | R10.2 133.15,19.33 R13.2 128.31,19.38 R14.2 | TP16_3V3.TP 28.1,7.48 | 28.1,7.48 61.37,7.48 Q3.3 | 30.18,37.52 32.36,39.7 R1.2 32.43,39.8 33.19,40.55 39.95,40.55 45.55,46.15 | 30.18,37.52 22.35,29.69 R_CL1.2 22.6,29.1 22.6,20.1 25.1,17.6 v25.1,15.6 | 45.55,46.15 U5.3 | C1_BAT2.1 137.52,60.8 139.17,62.45 139.17,64 138.42,64.76 125.39,64.76 125.17,64.53 125.17,60.6 | v11.6,50.1 11.1,50.6 11.1,51.6 U2.2 | v11.6,87.6 9.1,90.1 8.6,90.1 8.63,90.07 | v28.1,7.6 28.1,7.48 | 87.6,59.6 87.6,57.6 89.1,56.1 U6.2 | v136.6,46.6 138.1,45.1 C3.+ | v125.1,60.6 125.17,60.6 | v138.6,20.1 139.1,19.6 R10.2 | 55.18,50.52 v54.6,51.1 | v45.6,46.1 45.55,46.15 | v21.1,46.1 25.6,41.6 v26.1,41.6 | v30.1,37.6 30.18,37.52
  Bottom 0.3: v11.6,50.1 11.1,50.6 11.1,56 | 11.1,56 11.1,57.1 11.6,57.6 v11.6,87.6 | v25.1,15.6 25.1,8.7 25.4,8.4 27.3,8.4 v28.1,7.6 | v125.1,60.6 125.1,58.1 v136.6,46.6 136.6,22.1 v138.6,20.1 | v45.6,46.1 50.6,51.1 v54.6,51.1 | v21.1,46.1 11.2,56 11.1,56 | v30.1,37.6 v26.1,41.6
32KHZ  (via drill 0.35)
  Top 0.152: 89.6,57.6 90.1,57.1 90.1,56.1 U6.1 | 89.6,57.6 89.1,58.1 R2_PINH1.1 | v25.1,55.1 20.1,55.1 19.71,54.71 U2.9 | v28.6,58.6 29.1,58.1 v40.6,58.1 | 89.6,57.6 v89.6,57.1
  Bottom 0.152: v28.6,58.6 v25.1,55.1 | v40.6,58.1 42.1,59.6 87.1,59.6 v89.6,57.1
DN
  Top 0.152: J1.B7 160.8,53.76 | 160.8,53.76 152.7,53.76 151.94,53 D1.4 | J1.A7 160.6,54.75 160.5,54.65 160.5,54.06 160.8,53.76
DP
  Top 0.152: D1.6 151.94,54.9 152.28,55.25 160.84,55.25 160.86,55.26 J1.B6 162.68,55.26 162.95,54.99 162.95,54.53 162.68,54.26 J1.A6
EPD_3V3  (via drill 0.35)
  Top 0.3: TP17_EPD_3V3.TP 31.8,4.01 62.09,4.01 62.44,4.36 Q3.2 v61.6,6.1 | L1.2 86.15,37.12 C77.1 86.15,34.34 86.64,33.85 86.64,30.6 v86.6,30.6 | J3.16 J3.15 81.56,14.73 77.48,14.73 52.92,39.29 52.92,47.38 53.52,47.98 62.81,47.98 75.84,34.95 79.22,34.95 79.57,34.6 79.57,32.66 83.22,29.02 85.02,29.02 v86.6,30.6 | v86.6,30.6 86.6,27.99 EPD_C5.1
  Bottom 0.3: v86.6,30.6 79.6,30.6 79.6,24.1 v61.6,6.1
EPD_3V3_C  (via drill 0.35)
  Top 0.3: U2.18 22.25,65.33 26.81,60.77 26.81,35.36 25.58,34.12 | 25.58,34.12 21.05,29.6 R_CL1.1 21.1,29.1 v21.1,21.1 | v60.6,6.6 60.6,5.6 Q3.1 | v41.1,32.6 40.6,32.1 v27.6,32.1 | v25.6,34.1 25.58,34.12 | v7.1,7.1 5.6,7.1 TP13_EPD_3V3_C.TP
  Bottom 0.3: v60.6,6.6 60.1,7.1 60.1,13.6 v41.1,32.6 | v25.6,34.1 v27.6,32.1 | v21.1,21.1 v7.1,7.1
EPD_BUSY  (via drill 0.35)
  Top 0.152: v13.1,62.6 12.1,62.6 12.1,69.1 U2.26 | v12.1,54.1 13.1,54.1 13.65,54.65 13.65,56.2 13.25,56.6 v13.1,56.6 | v18.6,28.1 18.6,22.1 19.15,21.55 v19.15,13 18.85,13.3 17.85,13.3 17.06,14.09 TP9_EPD_BUSY.TP | v19,11.15 19,6.5 23,2.5 67.9,2.5 73.13,7.73 73.13,10.68 73.82,11.37 76.77,11.37 78.29,12.89 v78.4,12.89 | J3.9 85.26,14.8 85.36,14.7 85.36,13.96 v84.85,13.45
  Bottom 0.152: v13.1,56.6 v13.1,62.6 | v12.1,54.1 13.6,52.6 13.6,33.1 v18.6,28.1 | v84.85,13.45 84.4,13 78.51,13 v78.4,12.89 | v19,11.15 19,12.85 v19.15,13
EPD_CS  (via drill 0.35)
  Top 0.152: R11.1 144.13,10.33 D11.2 143.9,10.08 143.16,9.35 136.18,9.35 135.98,9.15 131.85,9.15 131.2,9.8 131.2,14.5 130.6,15.1 v128.1,15.1 | TP10_EPD_CS.TP 21.58,15.58 | 21.58,15.58 20.47,16.69 20.47,49.64 22.25,51.42 U2.11 | v126.6,16.6 125.9,17.3 93.35,17.3 93.15,17.1 v93.1,17.1 | v78.25,21.15 77.1,22.3 v77.1,22.6 | v45.6,30.6 41.1,26.1 v32.6,26.1 | v23.6,17.1 22.1,15.6 21.6,15.6 21.58,15.58 | J3.12 83.88,15.55 83.88,15.93 83.9,15.94 v83.9,19.56
  Bottom 0.152: v126.6,16.6 v128.1,15.1 | v93.1,17.1 86,24.2 86,26.7 85.6,27.1 81.1,27.1 81.1,24 v78.25,21.15 79.84,19.56 v83.9,19.56 | v77.1,22.6 53.6,22.6 v45.6,30.6 | v23.6,17.1 v32.6,26.1
EPD_DC  (via drill 0.35)
  Top 0.152: v14.6,50.1 14.6,51.6 U2.5 | v21.1,43.6 21.15,43.55 21.15,34.85 21.9,34.1 v23.1,34.1 | v27.6,29.6 27.6,21.68 34.68,14.6 35.04,14.6 36.51,13.12 37.78,13.12 39.26,14.6 56.39,14.6 TP11_EPD_DC.TP v61.24,17.51 v61.25,17.5 | v71.9,17.5 72.9,16.5 v73.05,16.5 | J3.11 84.38,15.55 84.38,15.93 84.65,16.19 v84.65,18.4
  Bottom 0.152: v21.1,43.6 v14.6,50.1 | v27.6,29.6 v23.1,34.1 | v61.25,17.5 v71.9,17.5 | v73.05,16.5 75.5,16.5 77.95,18.95 84.05,18.95 84.6,18.4 v84.65,18.4
EPD_RST  (via drill 0.35)
  Top 0.152: v18.6,58.6 18.6,69.1 U2.21 | v35.6,16.1 36.6,15.1 37.13,15.1 37.14,14.99 | TP12_EPD_RST.TP 37.14,14.99 | J3.10 84.76,14.71 84.75,14.7 v84.75,14.45 | v39.05,16.1 37.94,14.99 37.14,14.99
  Bottom 0.152: v18.6,58.6 22.1,55.1 22.1,50.1 25.1,47.1 25.1,40.6 35.6,30.1 v35.6,16.1 | v84.75,14.45 83.8,13.5 77.8,13.5 77.1,12.8 76.4,12.8 76.31,12.89 75.81,12.89 75.22,12.3 71.3,12.3 62.55,3.55 40.62,3.55 39.05,5.12 v39.05,16.1
FLASH_CS  (via drill 0.35)
  Top 0.152: R12.1 148.99,10.18 D10.2 148.6,9.6 v147.6,9.6 | v27.6,50.1 46.6,50.1 U5.1 47.1,50.1 v47.1,52.1 | v26.1,50.1 25.6,50.6 24.1,50.6 23.1,51.6 U2.12 | v83.6,34.6 v85.1,33.1
  Bottom 0.152: v26.1,50.1 v27.6,50.1 | v147.6,9.6 94.1,9.6 94.1,18.6 90.6,22.1 90.6,27.6 v85.1,33.1 | v83.6,34.6 66.1,52.1 v47.1,52.1
GDR  (via drill 0.35)
  Top 0.152: Q2.1 60.12,25.95 57.77,23.6 57.77,22.27 62.16,17.88 62.16,17.12 59.91,14.87 59.91,13.85 57.35,11.28 57.35,10.22 57.54,10.02 58.87,10.02 59.2,10.35 R4.2 60,10.75 v67.33,3.42 | J3.2 88.88,15.55 88.88,15.93 89.02,16.06 89.91,16.06 89.95,16.1 v90,16.1
  Bottom 0.152: v90,16.1 92.15,16.1 93.25,15 93.25,12.1 92.52,11.37 73.27,11.37 69.85,7.95 69.85,5.9 67.35,3.4 v67.33,3.42
GND  (via drill 0.35)
  Top 0.127: 16.6,91.54 15.94,92.2 15.57,92.21 15.46,92.32 15.47,94.27 15.47,96.07 16.6,97.2
  Top 0.152: BOOT_BUTTON.2 BOOT_BUTTON.1 21.05,107.77 C6.2 18.32,105.32 8.6,95.6 8.6,91.82 J2.P6 6.16,91.57 6.6,91.57 | 16.6,91.54 16.24,91.18 J2.G2 17.09,90.44 18.69,88.84 18.69,85.45 17.98,84.74 J2.G1 14.36,82.6 2.61,82.6 | C9.2 16.6,97.2 44.1,97.2 C4.2 44.09,96.88 45.91,98.7 IC2.3 45.6,99.6 v44.6,99.6 | C5.2 43.97,107.67 44.32,107.32 45.61,107.32 RESET_BUTTON.1 | RESET_BUTTON.1 RESET_BUTTON.2 51.08,108.51 52.38,107.22 53.44,107.22 54.39,108.16 59.01,108.16 C7.2 61.64,108.37 CHANGE_BUTTON.1 CHANGE_BUTTON.2 | C2_BAT.2 106.57,62.37 105.39,61.19 C1_BAT.2 105.39,60.99 109.2,57.18 111.37,57.18 113.67,54.88 R2_BAT.1 113.6,54.6 114.1,54.1 v114.6,54.1 | U4.9 118.28,46.47 117.73,45.92 U4.4 | U4.9 118.53,46.42 U4.6 119.58,46.42 121.7,44.31 U3.1 | U4.1 117.73,47.42 118.28,46.87 U4.9 | C1.2 114.96,38.58 C2.2 | C1.2 118.49,38.58 U3.7 119.29,38.87 120.09,39.67 U3.1 | J1.MP1 J1.MP3 161.6,49.86 161.6,50.6 161.18,51.02 | J1.MP2 164.15,59.62 | 164.15,59.62 J1.MP4 162.2,59.7 161.1,58.6 161.1,57.66 J1.B1 J1.A12 | D8.1 132.37,7.95 D9.1 139.14,8.4 D12.1 D11.1 148.81,8.6 D10.1 152.1,8.55 | 152.1,8.55 153.24,8.55 D7.1 | R4.1 58.1,10.75 58.75,11.4 60.78,11.4 61.37,10.81 R2.1 66.64,9.1 | 66.64,9.1 66.64,6.88 SJ1.1 | 2.61,82.6 2.61,82.05 3.32,81.34 3.81,81.34 | 3.81,81.34 9.55,75.6 U2.28 9.55,64.69 U2.29_3 | 3.81,81.34 3.36,81.79 J2.G3 | U2.29_6 U2.29_9 | U2.29_6 U2.29_3 | U2.29_6 U2.29_5 U2.29_4 | U2.29_8 U2.29_7 U2.29_4 | U2.29_4 U2.29_1 14.1,57.6 v10.6,57.6 | U2.29_3 U2.29_2 | R2-USB.2 152.72,57.23 v151.59,56.11 | v151.59,56.11 149.44,53.95 D1.2 | U1.2 107.09,48.5 106.15,47.55 | 106.15,47.55 104.16,45.57 98.97,45.57 C10_SUPERCAP.2 96.26,37.46
  Top 0.152: C77.2 87.45,30.3 90.35,27.4 EPD_C2.2 | 96.26,37.46 96.54,37.18 | U6.13 86.26,46.19 C8.2 86.6,42.6 87.1,42.1 88.6,42.1 v89.1,42.6 | 96.54,37.18 D3.1 96.26,37.46 | 96.54,37.18 93.8,34.44 C77.2 | 133.6,58.17 136.39,58.17 138.82,60.6 C1_BAT2.2 139.1,61.1 v139.6,61.6 | 133.6,58.17 127.45,58.17 126.76,57.48 R1_PWRUSB.1 126.6,57.1 126.1,56.6 v125.6,56.6 | v47.1,102.6 47.1,104.57 46.8,104.88 RESET_BUTTON.1 | v10.6,50.1 9.6,51.1 9.6,51.6 U2.1 | v157.1,17.6 157.1,16.6 C5_USB.2 | 152.1,8.55 v152.1,9.1 | J4.1 164.16,17.1 v162.6,17.1 | C4_USB.2 146.1,46.1 v144.1,46.1 142.1,46.1 141.1,45.1 C3.- | 159.1,51.1 161.1,51.1 161.18,51.02 | 159.1,51.1 156.85,51.1 R2-USB1.1 | 159.1,51.1 v159.1,51.6 | v164.15,59.6 164.15,59.62 | 161.18,51.02 J1.A1 J1.B12 | v151.6,56.1 v151.59,56.11 | 46.1,45.6 33.6,33.1 v31.6,33.1 | 46.1,45.6 46.6,46.1 U5.4 | 31.6,27.1 31.6,21.1 31.51,21.1 TP5_GND.TP | 31.6,27.1 v31.6,30.6 | v25.1,24.1 24.1,24.1 24.1,21.1 TP4_GND.TP | v50.6,45.1 50.6,47.6 U5.9 | 46.1,45.6 v46.6,45.1 | C1_BAT1.2 138.6,63.1 133.6,58.1 133.6,58.17 | v120.6,57.6 121.6,58.6 IC1.2 | v122.1,43.1 122.1,39.6 U3.1 | U3.5 118.6,37.1 117.1,38.6 C1.2 | v87.6,33.1 87.1,33.6 87.6,34.1 C77.2 | v76.6,14.1 76.6,13.1 J3.MP2 | v89.1,13.1 90.1,13.1 J3.MP1 | v66.6,9.1 66.64,9.1 | v106.6,47.6 106.1,47.6 106.15,47.55 | v41.1,27.1 31.6,27.1 | J3.8 85.88,15.31 85.88,14.93 86.39,14.43 v86.39,13.97 | J3.17 81.26,15.8 81.61,16.16 81.61,16.66 81.21,17.05 v81.21,17.35 | 6.6,91.57 6.61,91.59 6.8,91.59 6.84,91.63 6.01,91.63 4.9,92.75 4.9,93.05 J2.G4 | 6.6,91.57 6.56,91.54 5.01,91.54 2.61,89.14 2.61,82.6 | EPD_C1.2 92.78,27.55 92.62,27.4 EPD_C2.2 | v79.61,18.29 79.98,18.67 79.98,25.77 EPD_C7.2 81.51,27.4 EPD_C8.2
  Top 0.152: EPD_C6.2 85.5,26.1 v85.55,26.1 85.65,26 EPD_C5.2 88.69,27.4 EPD_C2.2 | EPD_C11.2 EPD_C12.2 | EPD_C11.2 | EPD_C11.2 EPD_C10.2 EPD_C9.2 | EPD_C9.2 | EPD_C9.2 EPD_C8.2 | EPD_C8.2
  Bottom 0.152: v47.1,102.6 44.6,100.1 v44.6,99.6 39.6,94.6 39.6,49.6 44.1,45.1 v46.6,45.1 v50.6,45.1 | v10.6,57.6 v10.6,50.1 | 156.6,17.1 153.1,13.6 153.1,10.1 v152.1,9.1 | 156.6,17.1 v157.1,17.6 | 156.6,17.1 v162.6,17.1 164.29,17.1 166.7,19.51 166.7,33 159.1,40.6 | v164.15,59.6 159.1,59.6 159.1,56.1 | 159.1,56.1 v159.1,51.6 159.1,40.6 | v144.1,46.1 146.6,43.6 146.6,42.9 150.5,39 157.35,39 158.95,40.6 159.1,40.6 | 159.1,56.1 v151.6,56.1 150.6,56.1 145.1,61.6 v139.6,61.6 | v31.6,33.1 v31.6,30.6 v25.1,24.1 | 121.6,56.6 122.1,56.1 v122.1,43.1 | 121.6,56.6 v120.6,57.6 120.6,56.1 118.6,54.1 v114.6,54.1 108.1,47.6 v106.6,47.6 | 121.6,56.6 v125.6,56.6 | v89.1,42.6 87.6,41.1 v87.6,33.1 | v41.1,27.1 59.6,8.6 59.6,6.6 61.1,5.1 63.1,5.1 63.1,5.6 v66.6,9.1 68.6,11.1 68.6,12.1 70.6,14.1 v76.6,14.1 79.69,17.19 | v86.39,13.97 86.82,13.97 87.69,13.1 v89.1,13.1 87.76,14.44 87.76,14.75 87.4,15.11 87.37,15.11 85.51,16.97 85.23,16.97 84.9,17.3 | 84.9,17.3 84.6,17.6 81.15,17.6 80.9,17.35 | v85.55,26.1 85.55,18.44 84.9,17.79 84.9,17.3 | v79.61,18.29 79.69,18.21 79.69,17.19 | 80.9,17.35 79.85,17.35 79.69,17.19 | v81.21,17.35 80.9,17.35
GPIO8
  Top 0.152: R1.1 33.66,39.7 25.73,31.77 25.73,15.35 23.41,13.03 22.39,13.03 20.17,15.25 20.17,50.61 20.98,51.42 U2.10
I2C_PW  (via drill 0.35)
  Top 0.152: U3.8 117.49,39.67 C1.1 114.96,39.88 C2.1 114.6,39.6 v113.6,38.6 | R6.2 121.88,39.05 U3.2 | U3.2 120.09,38.87 119.29,38.07 U3.6 | v120.6,32.1 120.6,31.1 R5.2 | v120.6,38.6 121.1,39.1 121.6,39.1 U3.2 | v47.1,55.1 47.1,55.6 36.6,66.1 23.6,66.1 23,66.7 23,68.5 23.6,69.1 U2.17 | v88.1,48.6 90.6,51.1 94.6,51.1 v96.1,49.6
  Bottom 0.152: v120.6,32.1 v120.6,38.6 v113.6,38.6 107.1,38.6 v96.1,49.6 | v47.1,55.1 81.6,55.1 v88.1,48.6
INT_RTC  (via drill 0.35)
  Top 0.152: R1_PINH1.1 86.1,58.6 v86.1,57.6 87.6,56.1 U6.3 | v19.1,50.1 18.6,50.1 18.6,51.6 U2.8 | v18.1,8.6 16.6,7.1 TP15_INT_RTC.TP | v42.6,47.6 40.1,45.1 31.6,45.1 27.6,41.1 v27.6,37.1
  Bottom 0.152: v19.1,50.1 22.1,47.1 22.1,37.1 | 22.1,37.1 22.1,12.6 v18.1,8.6 | v86.1,57.6 81.6,57.6 80.6,58.6 43.85,58.6 42.6,57.35 v42.6,47.6 | 22.1,37.1 v27.6,37.1
IO/BOOT  (via drill 0.35)
  Top 0.152: v27.1,69.1 26.1,69.1 U2.15 | v35.6,101.6 27.74,109.46 R_BOOT.1 26.06,109.24 BOOT_BUTTON.3 BOOT_BUTTON.4 21.02,109.24 20.01,109.24 19.84,109.07 C6.1
  Bottom 0.152: v27.1,69.1 35.6,77.6 v35.6,101.6
IO/CHANGE  (via drill 0.35)
  Top 0.152: v15.6,67.6 15.6,69.1 U2.23 | v13.1,73.1 34.6,94.6 v45.6,94.6 | v56.75,108.66 57.76,109.67 C7.1 59.56,110.01 CHANGE_BUTTON.4 CHANGE_BUTTON.3 66.05,109.24 66.06,109.24 66.53,108.77 R_CHANGE.1
  Bottom 0.152: v15.6,67.6 13.1,70.1 v13.1,73.1 | v45.6,94.6 45.6,96.3 56.75,107.45 v56.75,108.66
MISO  (via drill 0.35)
  Top 0.152: R15.1 153.72,10.53 D7.2 153.1,10.6 v152.1,10.6 | v126.6,11.6 123.6,14.6 v91.6,14.6 | v38.6,21.6 38.1,21.1 37.1,21.1 TP6_MISO.TP 47.51,31.21 47.51,47.99 U5.2 46.6,48.6 39.1,48.6 v38.6,49.1 | v18.6,77.6 13.1,72.1 11.1,72.1 11.1,69.6 U2.27 10.82,69.52 28.59,87.28 49.13,87.28 68.87,107.02 68.87,109.21 67.35,110.74 18.61,110.74 17.38,109.5 17.38,107.19 4.9,94.71 4.9,93.85 5.02,93.73 5.31,93.73 J2.P7
  Bottom 0.152: v152.1,10.6 126.6,10.6 v126.6,11.6 | v18.6,77.6 26.1,70.1 26.1,66.1 38.6,53.6 v38.6,49.1 | v91.6,14.6 88.67,11.67 71.1,11.67 62.68,3.24 40.49,3.24 38.44,5.29 38.44,16.35 38.6,16.51 v38.6,21.6
MOSI  (via drill 0.35)
  Top 0.152: R14.1 127.91,18.38 127.48,17.95 D8.2 127.48,9.46 123.24,13.71 87.65,13.71 86.48,12.54 84.47,12.54 83.94,13.07 83.94,13.77 83.61,14.11 | 83.61,14.11 82.76,14.95 J3.14 | TP7_MOSI.TP 6.55,12.61 10.95,12.61 16.24,17.9 16.24,50.04 17.17,50.97 U2.7 17.1,51.1 v19.1,49.1 | v53.6,46.1 54.6,46.1 U5.5 | v26.1,42.6 21.6,47.1 v21.1,47.1 | 83.61,14.11 | 83.61,14.11 v83.54,14.11 | J2.P3 6.34,88.28 9.92,88.28 v14.6,83.6
  Bottom 0.152: v53.6,46.1 50.1,42.6 40.1,42.6 | v26.1,42.6 40.1,42.6 | v21.1,47.1 v19.1,49.1 17.6,50.6 17.6,80.6 v14.6,83.6 | 40.1,42.6 40.1,5.1 40.55,4.65 59.05,4.65 59.25,4.45 62.95,4.45 71.69,13.19 76.69,13.19 77.6,14.1 v83.53,14.1 v83.54,14.11
N$1
  Top 0.152: J1.B5 162.05,56.14 160.85,56.14 160.72,56.01 160.72,55.82 160.45,55.55 154.25,55.55 R2-USB.1
N$2  (via drill 0.35)
  Top 0.152: C1_BAT1.1 137.22,63.33 132.4,58.51 122.99,58.51 122.01,59.49 IC1.1 122.1,59.6 v123.1,58.6 122.1,57.6 IC1.3 | v100.6,57.1 99.6,57.1 D2.1 | v116.1,57.6 117.1,58.6 Q1.2
  Bottom 0.152: v100.6,57.1 107.6,64.1 116.45,64.1 | 116.45,64.1 123.5,64.1 124.1,63.5 124.1,59.6 v123.1,58.6 | v116.1,57.6 115.15,58.55 115.15,62.8 116.45,64.1
N$3
  Top 0.152: U1.1 106.14,49.15 104.81,50.47 R1_BAT.2
N$4  (via drill 0.35)
  Top 0.152: v123.1,63.1 124.1,64.1 CHG_LED.C | v100.1,49.1 99.1,50.1 R1_BAT.1
  Bottom 0.152: v123.1,63.1 115.1,55.1 112.1,55.1 112.1,54.1 107.1,49.1 v100.1,49.1
N$5
  Top 0.152: J3.4 87.91,15.58 87.91,15.91 93.86,21.87 EPD_C1.1
N$6  (via drill 0.35)
  Top 0.152: v111.6,55.6 112.1,55.1 R2_BAT.2 | v107.1,51.1 106.6,51.6 106.1,51.6 U1.5
  Bottom 0.152: v107.1,51.1 v111.6,55.6
N$7
  Top 0.152: J3.5 87.41,15.58 87.41,15.91 90.45,18.96 EPD_C2.1
N$8  (via drill 0.35)
  Top 0.152: D3.2 88.62,41.78 74.24,41.78 73.08,40.62 | 73.08,40.62 C44.1 | v66.1,36.1 65.1,36.1 D4.1 | 73.08,40.62 v72.6,41.1
  Bottom 0.152: v66.1,36.1 71.1,41.1 v72.6,41.1
N$9
  Top 0.152: J1.A5 158.1,53.26 157.66,52.82 R2-USB1.2
N$10  (via drill 0.35)
  Top 0.152: v47.6,99.1 45.6,97.1 C4.1 | v47.6,101.6 48.6,101.6 IC2.5
  Bottom 0.152: v47.6,101.6 v47.6,99.1
N$11  (via drill 0.35)
  Top 0.152: EPD_C6.1 84.25,23 83.75,22.5 v83.75,22.45 | v82.4,21.9 80.76,20.26 J3.18
  Bottom 0.152: v83.75,22.45 83.25,21.95 82.45,21.95 v82.4,21.9
N$12
  Top 0.152: EPD_C7.1 81.56,22.76 80.26,21.46 J3.19
N$13
  Top 0.152: J3.20 79.61,15.58 79.61,15.91 78.87,16.66 EPD_C8.1
N$14
  Top 0.152: J3.22 78.61,15.58 78.61,15.91 73.94,20.59 EPD_C10.1
N$15
  Top 0.152: EPD_C12.1 68.85,24.34 J3.24
N$17  (via drill 0.35)
  Top 0.152: v93.6,52.6 93.1,52.1 R_CAPACITOR.1 | v94.1,61.6 93.6,62.1 93.1,62.1 D6.1
  Bottom 0.152: v93.6,52.6 94.1,53.1 v94.1,61.6
PREVGH  (via drill 0.35)
  Top 0.152: J3.21 79.14,15.55 79.14,15.93 76.48,18.58 | 76.48,18.58 | v78.6,32.6 78.6,34.1 D5.1 | 76.48,18.58 EPD_C9.1 77.25,26.1 77.6,26.45 v77.6,26.6
  Bottom 0.152: v78.6,32.6 77.6,31.6 v77.6,26.6
PREVGL  (via drill 0.35)
  Top 0.152: J3.23 78.14,15.55 78.14,15.93 71.4,22.66 EPD_C11.1 70.6,26.1 v70.1,26.6 | v68.6,32.6 68.6,36.1 D4.2
  Bottom 0.152: v68.6,32.6 70.1,31.1 v70.1,26.6
RESE  (via drill 0.35)
  Top 0.152: Q2.2 60.66,24.65 64.35,20.96 R3.2 75.27,13.23 76.3,12.2 76.14,12.2 v76.06,12.28 | v87.15,14.5 87.45,14.8 88,14.8 88.14,14.93 88.14,15.31 J3.3
  Bottom 0.152: v87.15,14.5 87.07,14.58 86.14,14.58 85.78,14.23 85.78,13.53 84.54,12.28 v76.06,12.28
RESE'
  Top 0.152: R3.1 64.02,12.26 66.59,12.26 67.94,10.91 R2.2 68,10.75 SJ1.2
RESET  (via drill 0.35)
  Top 0.152: R_RESET.2 52.81,109.07 52.3,108.56 52.1,108.56 | 40.9,107.6 40.9,109.1 41.9,109.1 C5.1 44.7,108.97 44.97,109.24 46.03,109.24 RESET_BUTTON.4 RESET_BUTTON.3 51.07,109.24 51.08,109.24 51.76,108.56 52.1,108.56 | R_RESET.1 52.6,108.1 52.1,108.6 52.1,108.56 | v12.6,50.1 12.1,50.6 12.1,51.6 U2.3 | 40.9,107.6 v30.6,107.6 | 40.9,107.6 41.4,107.6 45.6,103.4 45.6,101.84 IC2.1
  Bottom 0.152: v30.6,107.6 9.6,86.6 9.6,48.8 10.35,48.05 10.55,48.05 v12.6,50.1
RTC_RST  (via drill 0.35)
  Top 0.152: v28.6,67.1 25.1,67.1 24.86,67.34 24.86,69.19 | v43.6,57.1 v38.6,57.1 | v85.6,54.1 86.6,55.1 86.6,55.6 U6.4 | 25.1,69.1 24.86,69.19 | 24.86,69.19 U2.16
  Bottom 0.152: v38.6,57.1 v28.6,67.1 | v43.6,57.1 44.6,58.1 80.6,58.1 84.6,54.1 v85.6,54.1
RX
  Top 0.152: TP2_RX.TP 10.69,49.06 8.87,50.88 8.87,52.57 9.45,53.14 13.07,53.14 17.15,57.22 17.15,64.07 14.63,66.59 U2.24
SCK  (via drill 0.35)
  Top 0.152: R13.1 133.1,10.18 D9.2 132.82,14.69 128.56,18.96 93.72,18.96 89.25,14.5 88,14.5 86.35,12.84 84.6,12.84 84.24,13.2 84.24,14.1 84.14,14.2 84.14,14.36 83.7,14.8 83.52,14.8 83.26,15.06 J3.13 83.26,18.13 83.12,18.27 83.12,26.97 62.67,47.41 U5.6 54.6,47.6 54.1,47.6 v53.6,47.1 | TP8_SCK.TP 15.9,19.3 U2.6 15.6,52.1 16.6,53.1 17.6,53.1 17.6,56.4 | v16.6,67.6 16.6,65.1 17.6,64.1 17.6,56.4 | J2.P5 5.3,90.44 4.81,90.44 4.69,90.31 4.69,89.45 4.88,89.26 4.88,87.02 4.88,86.15 4.99,86.03 5.39,86.03 7.82,83.6 v13.1,83.6 | v22.1,56.1 21.75,55.75 18.25,55.75 17.6,56.4
  Bottom 0.152: v13.1,83.6 16.6,80.1 v16.6,67.6 | v22.1,56.1 25.1,53.1 25.1,50.1 32.1,43.1 50.1,43.1 50.1,43.6 v53.6,47.1
SCL  (via drill 0.35)
  Top 0.152: U4.7 119.58,46.92 125.53,40.98 125.53,37.3 125.39,37.17 121.8,37.17 U3.4 121.7,36.3 v121.75,36.25 | v122.1,30.1 122.1,31.1 R5.1 121.75,31.31 v121.75,32.5 | v162.1,19.6 163.1,20.6 164.8,20.6 J4.4 | v23.1,65.6 29.6,59.1 43.1,59.1 44.6,57.6 v44.6,57.1 | v90.6,48.1 90.6,47.6 90.1,47.1 90.1,46.6 U6.16 90.1,46.1 90.1,45.6 v91.1,44.6 | U2.20 20.1,69.1 20.1,64.1 21,63.2 21.45,63.2 21.6,63.35 v21.6,64.1 | v95.1,18.1 v123.6,18.1
  Bottom 0.152: v122.1,30.1 123.6,28.6 123.6,19.1 124.1,18.6 | 124.1,18.6 162.1,18.6 v162.1,19.6 | v23.1,65.6 v21.6,64.1 | v44.6,57.1 81.1,57.1 89.1,49.1 90.1,49.1 90.6,48.6 v90.6,48.1 | v123.6,18.1 124.1,18.6 | v95.1,18.1 91.1,22.1 v91.1,44.6 | v121.75,36.25 v121.75,32.5
SDA  (via drill 0.35)
  Top 0.152: U4.8 119.58,47.42 125.83,41.17 125.83,37.18 124.3,35.64 121.5,35.64 120.96,36.18 120.96,37.58 121.45,38.07 U3.3 122.02,37.75 R6.1 124.6,37.6 124.1,37.6 v123.6,38.1 | J4.3 164.04,19.7 v163.8,19.65 | v26.1,60.1 26.1,60.6 21.6,65.1 21.6,68.6 U2.19 | v27.6,58.6 30.1,56.1 v45.6,56.1 | v89.6,48.1 89.6,47.6 89.1,47.1 89.1,46.6 U6.15 89.1,46.1 89.1,45.6 91.1,43.6 92.1,43.6 v96.1,47.6
  Bottom 0.152: v163.8,19.65 163.05,19.65 162.1,20.6 139.6,20.6 139.6,20.1 138.85,19.35 124.1,19.35 124.1,31.8 | 124.1,31.8 124.1,37.6 v123.6,38.1 | v27.6,58.6 v26.1,60.1 | v45.6,56.1 81.6,56.1 v89.6,48.1 | v96.1,47.6 99.6,44.1 99.6,31.1 101.1,29.6 118.15,29.6 119.15,30.6 119.15,31.05 119.25,31.15 123.45,31.15 124.1,31.8
SIGNAL01
  pour Top: 74.26,10.26 74.28,10.28 92.52,10.28 92.54,10.26 92.56,10.24 92.58,10.22 92.58,0.18 170.02,0.18 170.02,111.12 0.28,111.12 0.28,0.08 74.22,0.08 74.22,10.22 74.24,10.24
SIGNAL_BOTTOM
  pour Bottom: 170.02,0.18 170.02,88.52 92.38,88.52 92.36,88.54 92.34,88.56 92.32,88.58 92.32,111.12 0.28,111.12 0.28,0.08 74.22,0.08 74.22,10.22 74.24,10.24 74.26,10.26 74.28,10.28 92.52,10.28 92.54,10.26 92.56,10.24 92.58,10.22 92.58,0.18
SRC  (via drill 0.35)
  Top 0.152: C44.2 73.6,39.6 74.1,39.1 79.6,39.1 L1.1 80.1,38.6 80.1,36.1 82.1,34.1 | v61.6,24.6 62.1,25.1 Q2.3 | 82.1,34.1 v80.6,32.6 | 82.1,34.1 D5.2
  Bottom 0.152: v61.6,24.6 79.1,24.6 79.1,31.1 v80.6,32.6
SS_SD  (via drill 0.35)
  Top 0.152: D12.2 139.47,10.23 R10.1 139.1,18.1 138.6,17.6 v138.1,17.6 | v12.6,84.6 10.1,87.1 7.43,87.1 J2.P2 | U2.4 13.6,52.1 13.6,53.1 13.9,53.4 14.8,53.4 v15.1,53.1 | v92.6,49.1 v94.1,47.6 | v80.6,67.1 v83.1,64.6 | v54.1,93.6 52.1,95.6 31.1,95.6 17.3,81.8 v12.6,81.8
  Bottom 0.152: v15.1,53.1 12.1,56.1 12.1,81.8 | 12.1,81.8 12.1,84.1 v12.6,84.6 | v138.1,17.6 124.1,17.6 122.3,15.8 96.8,15.8 96.15,16.45 96.15,45.55 v94.1,47.6 | v92.6,49.1 90.6,51.1 90.6,57.1 v83.1,64.6 | v54.1,93.6 v80.6,67.1 | 12.1,81.8 v12.6,81.8
TX
  Top 0.152: U2.25 13.36,69.52 14.04,70.2 33.35,70.2 47.82,55.73 47.82,29.78 34.99,16.95 34.99,15.07 36.64,13.43 37.66,13.43 42.97,18.74 60.87,18.74 61.86,17.75 61.86,17.25 58.9,14.29 39.38,14.29 37.91,12.82 36.39,12.82 34.91,14.29 32.33,14.29 30.34,12.31 5.12,12.31 3.94,13.48 3.94,19.61 TP1_TX.TP
USB_D+  (via drill 0.35)
  Top 0.152: v150.1,55.6 149.6,55.1 D1.1 | v40.6,61.1 39.1,62.6 v27.1,62.6 | v25.1,60.6 25.1,56.1 26.1,55.1 26.1,52.1 U2.14
  Bottom 0.152: v150.1,55.6 145.1,55.6 140.1,60.6 127.1,60.6 127.1,62.1 123.1,66.1 41.2,66.1 40.6,65.5 v40.6,61.1 | v25.1,60.6 v27.1,62.6
USB_D-  (via drill 0.35)
  Top 0.152: v148.1,52.1 149.1,53.1 D1.3 | v31.1,60.1 v41.6,60.1 | v25.1,54.1 25.1,52.1 U2.13
  Bottom 0.152: v148.1,52.1 140.1,60.1 126.6,60.1 126.6,62.1 123.1,65.6 42.15,65.6 41.5,64.95 41.5,60.2 v41.6,60.1 | v25.1,54.1 v31.1,60.1
VBAT  (via drill 0.35)
  Top 0.152: Q1.3 116.36,60.76 113.55,63.57 107.6,63.57 | 107.6,63.57 105.85,63.57 105.27,62.99 C2_BAT.1 | v26.1,36.1 v21.1,31.1 | v27.6,36.1 31.6,40.1 31.6,41.4 30.55,42.45 30.55,43.55 31.6,44.6 40.6,44.6 v43.6,47.6 | 107.6,63.57 v107.6,63.1 | TP3_VBAT.TP 17.6,21.1 17.6,28.65 18.05,29.1 v19.1,29.1 | v107.1,50.1 108.1,49.1 U1.3 108.04,48.5 109.61,46.92 U4.2 U4.3
  Bottom 0.152: v21.1,31.1 v19.1,29.1 | v27.6,36.1 v26.1,36.1 | v43.6,47.6 46.1,50.1 46.1,52.1 47.1,53.1 82.6,53.1 88.6,47.1 91.6,47.1 v107.6,63.1 108.6,62.1 108.6,61.6 106.1,59.1 106.1,51.1 v107.1,50.1
VBUS  (via drill 0.35)
  Top 0.3: 107.6,61.09 112.98,61.09 115.41,58.66 Q1.1 115.81,58.61 117.29,60.09 122.66,60.09 123.86,58.89 125.23,58.89 125.52,59.18 | 107.6,61.09 C1_BAT.1 | CHG_LED.A 125.92,59.57 125.52,59.18 | C4_USB.1 147.49,45.62 148.23,44.88 | 148.23,44.88 159.87,33.24 PFMF.050.1.2 158.36,31.61 C5_USB.1 | D2.2 102.74,57.04 | 102.74,57.04 108.04,51.75 U1.4 | v150.6,52.1 150.6,53.6 151.1,54.1 151.6,54.1 D1.5 | 148.23,44.88 v148.85,45.5 | v128.1,56.1 128.1,57.1 R1_PWRUSB.2 | v126.1,59.6 125.6,59.1 125.52,59.18 | v12.6,7.1 11.1,7.1 TP14_VBUS.TP | v26.6,18.1 26.65,18.15 26.65,30.25 27.2,30.8 30.8,30.8 31.6,31.6 v46.6,31.6 | v102.6,57.1 102.74,57.04 | v107.6,61.6 107.6,61.09
  Bottom 0.3: 148.85,50.35 148.6,50.1 134.1,50.1 v128.1,56.1 126.1,58.1 v126.1,59.6 | 148.85,50.35 v150.6,52.1 | v148.85,45.5 148.85,50.35 | v12.6,7.1 24.1,7.1 24.7,7.7 24.7,7.95 24,8.65 24,15.5 v26.6,18.1 | v46.6,31.6 49.1,34.1 83.1,34.1 83.6,33.6 84.6,33.6 84.6,39.1 v102.6,57.1 103.1,57.1 v107.6,61.6
VRTC  (via drill 0.35)
  Top 0.152: C8.1 87.69,43.17 U6.14 87.6,46.6 87.6,47.1 90.1,49.6 91.6,49.6 92.6,50.6 R_CAPACITOR.2 93.1,50.6 v95.1,48.6 | v98.6,44.1 98.6,43.1 C10_SUPERCAP.1
  Bottom 0.152: v98.6,44.1 95.1,47.6 v95.1,48.6
VUSB  (via drill 0.35)
  Top 0.3: v160.1,52.1 161.75,52.1 J1.A4 J1.B9 | v160.1,40.6 160.1,37.83 PFMF.050.1.1 | J1.B4 J1.A9 161.16,57.16 160.16,56.16 v160.1,56.16
  Bottom 0.3: v160.1,40.6 v160.1,52.1 v160.1,56.16
(copper drawn outside any net)
  shapes: Top area x11